# Altium PCB bdcmc25_revised.PcbDoc (part 1 of 4)
Units mm, origin at the board's own origin, x right, y up, seen from the top; angles counter-clockwise.
Board outline 177.8 x 69.85 mm, 4 copper layers (Top Layer, Layer 2 (GND), Layer 3 (GND), Bottom Layer), stack 0.603 mm thick; 363 components, 158 nets, 1074 pads, 732 vias.
Unrouted connection lines stored in the file: 6.
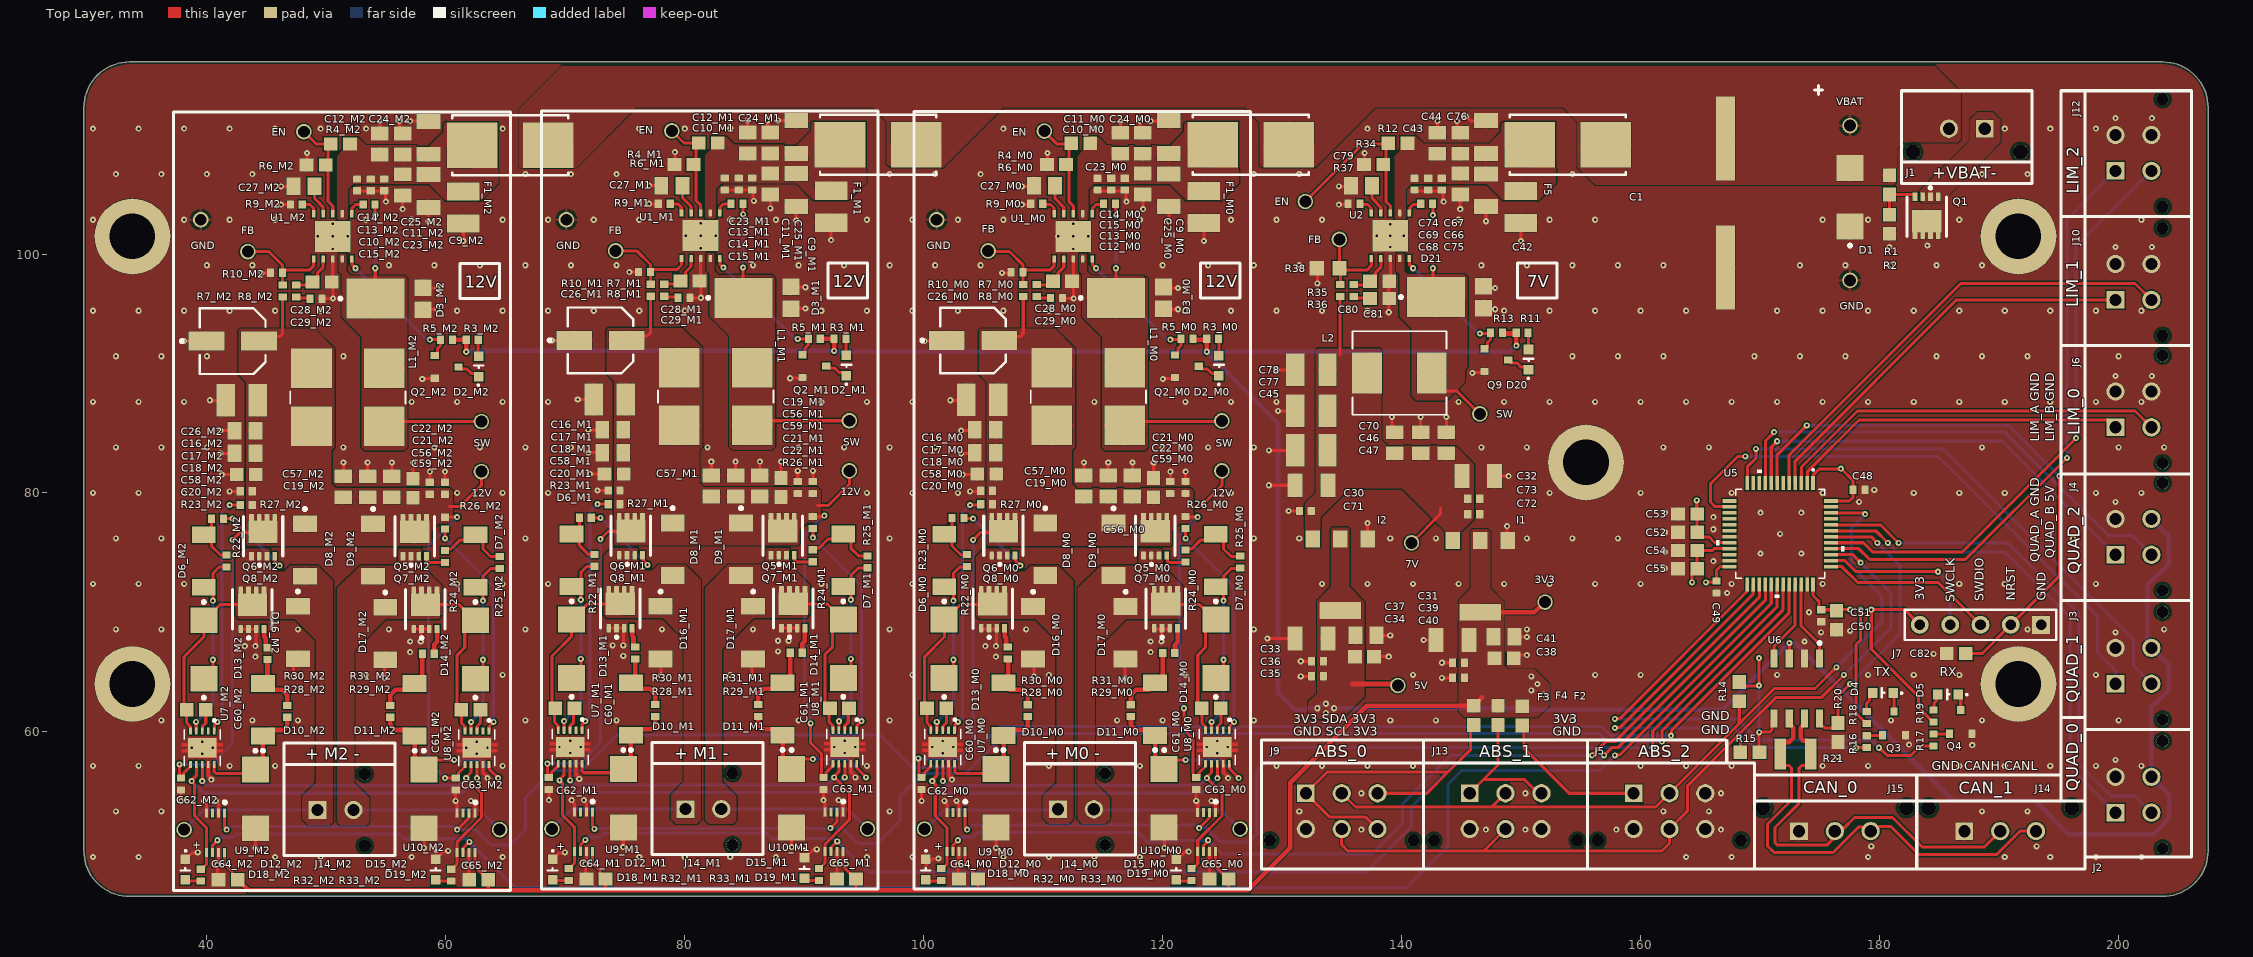
[diagram p0: Top Layer view]
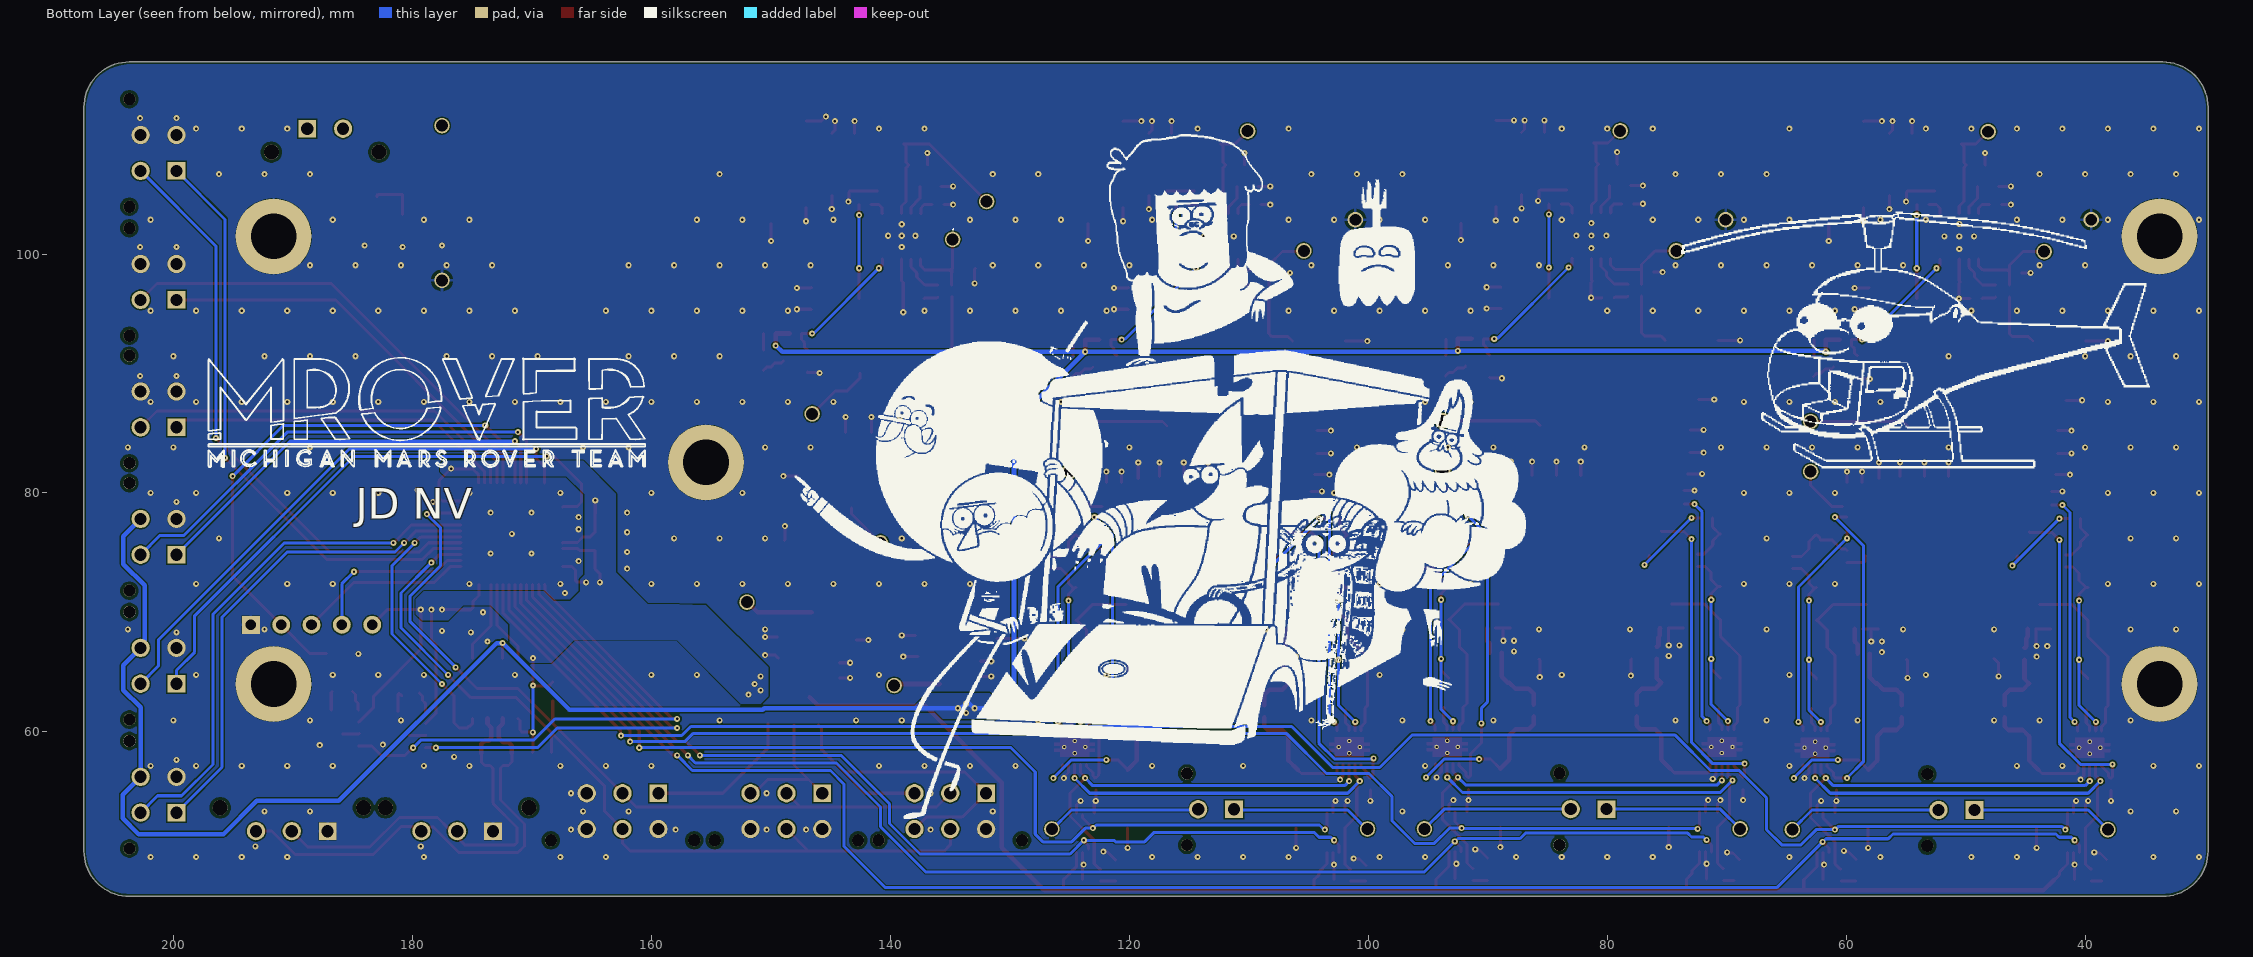
[diagram p1: Bottom Layer view, seen from below]
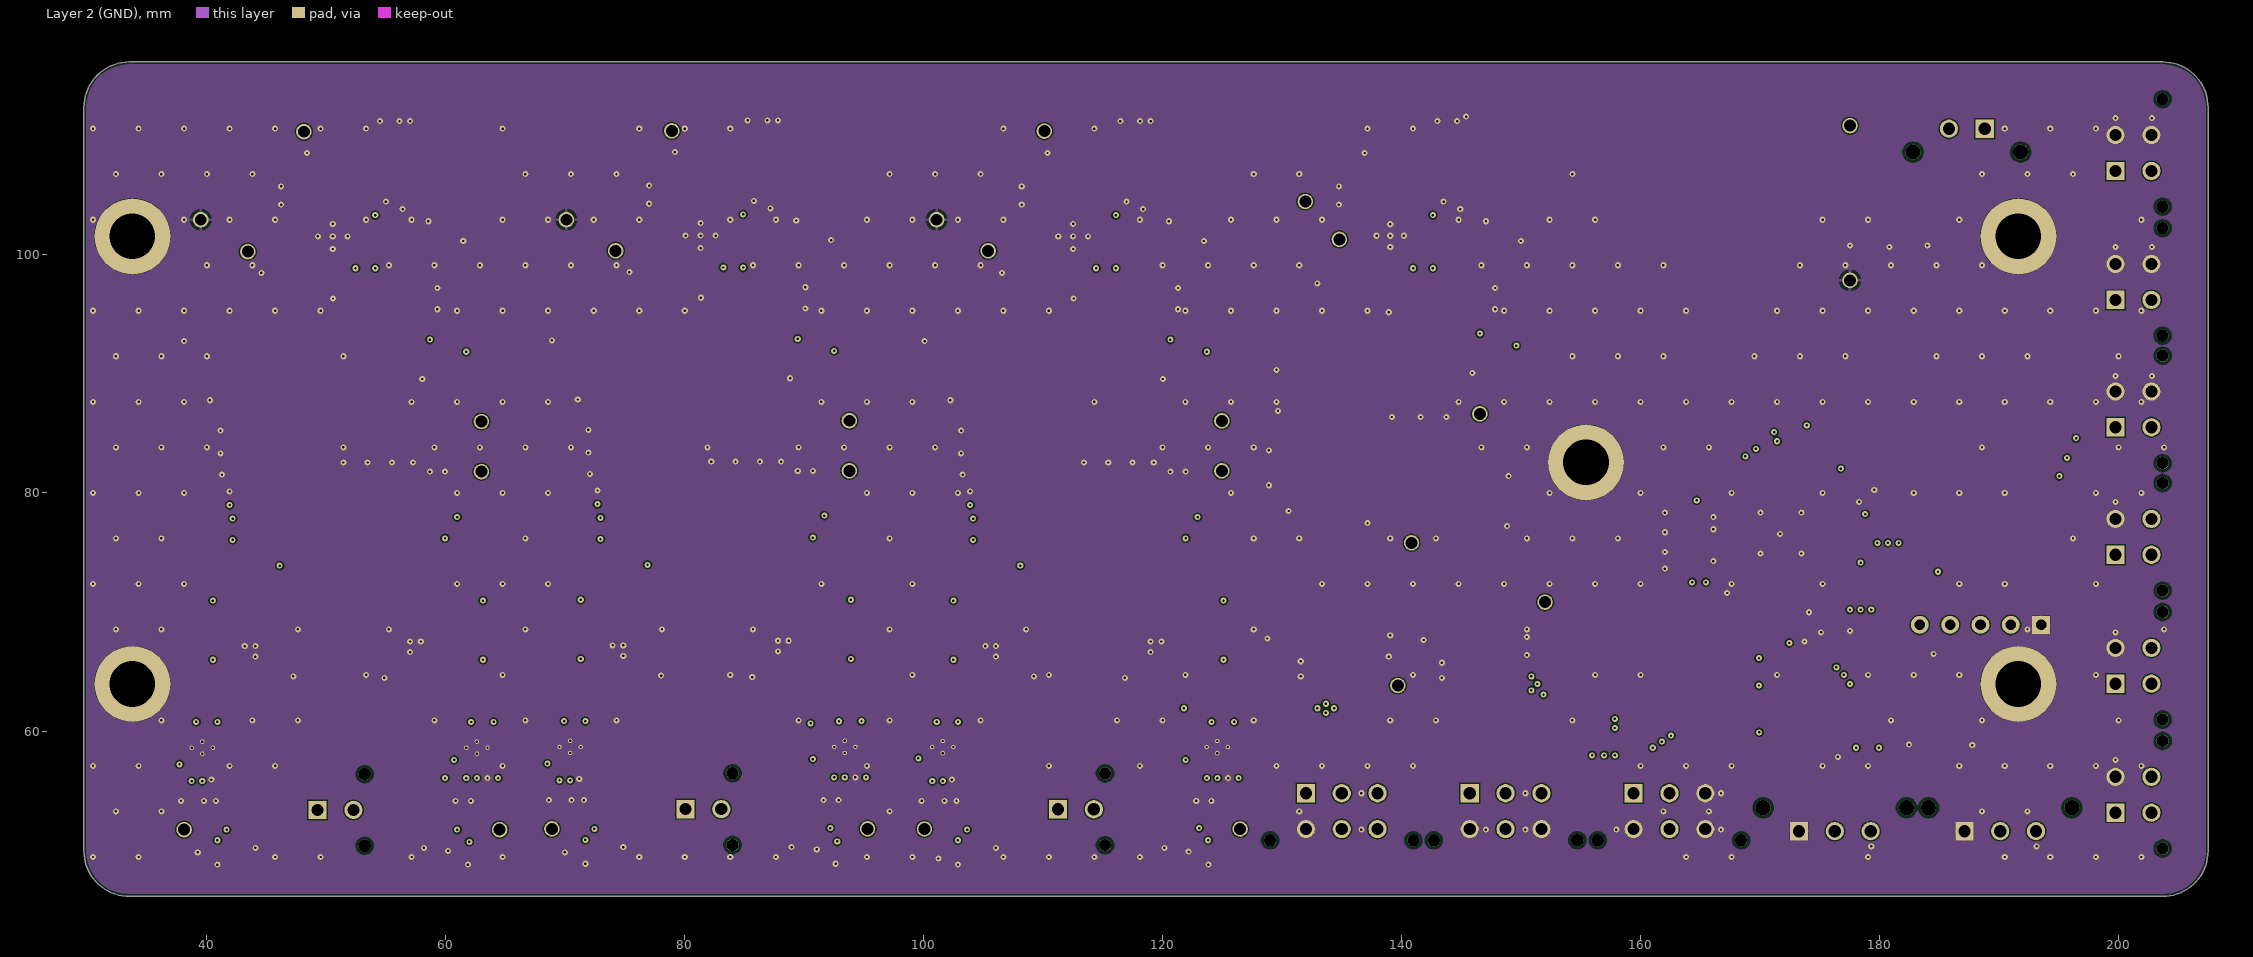
[diagram p2: Layer 2 (GND)]
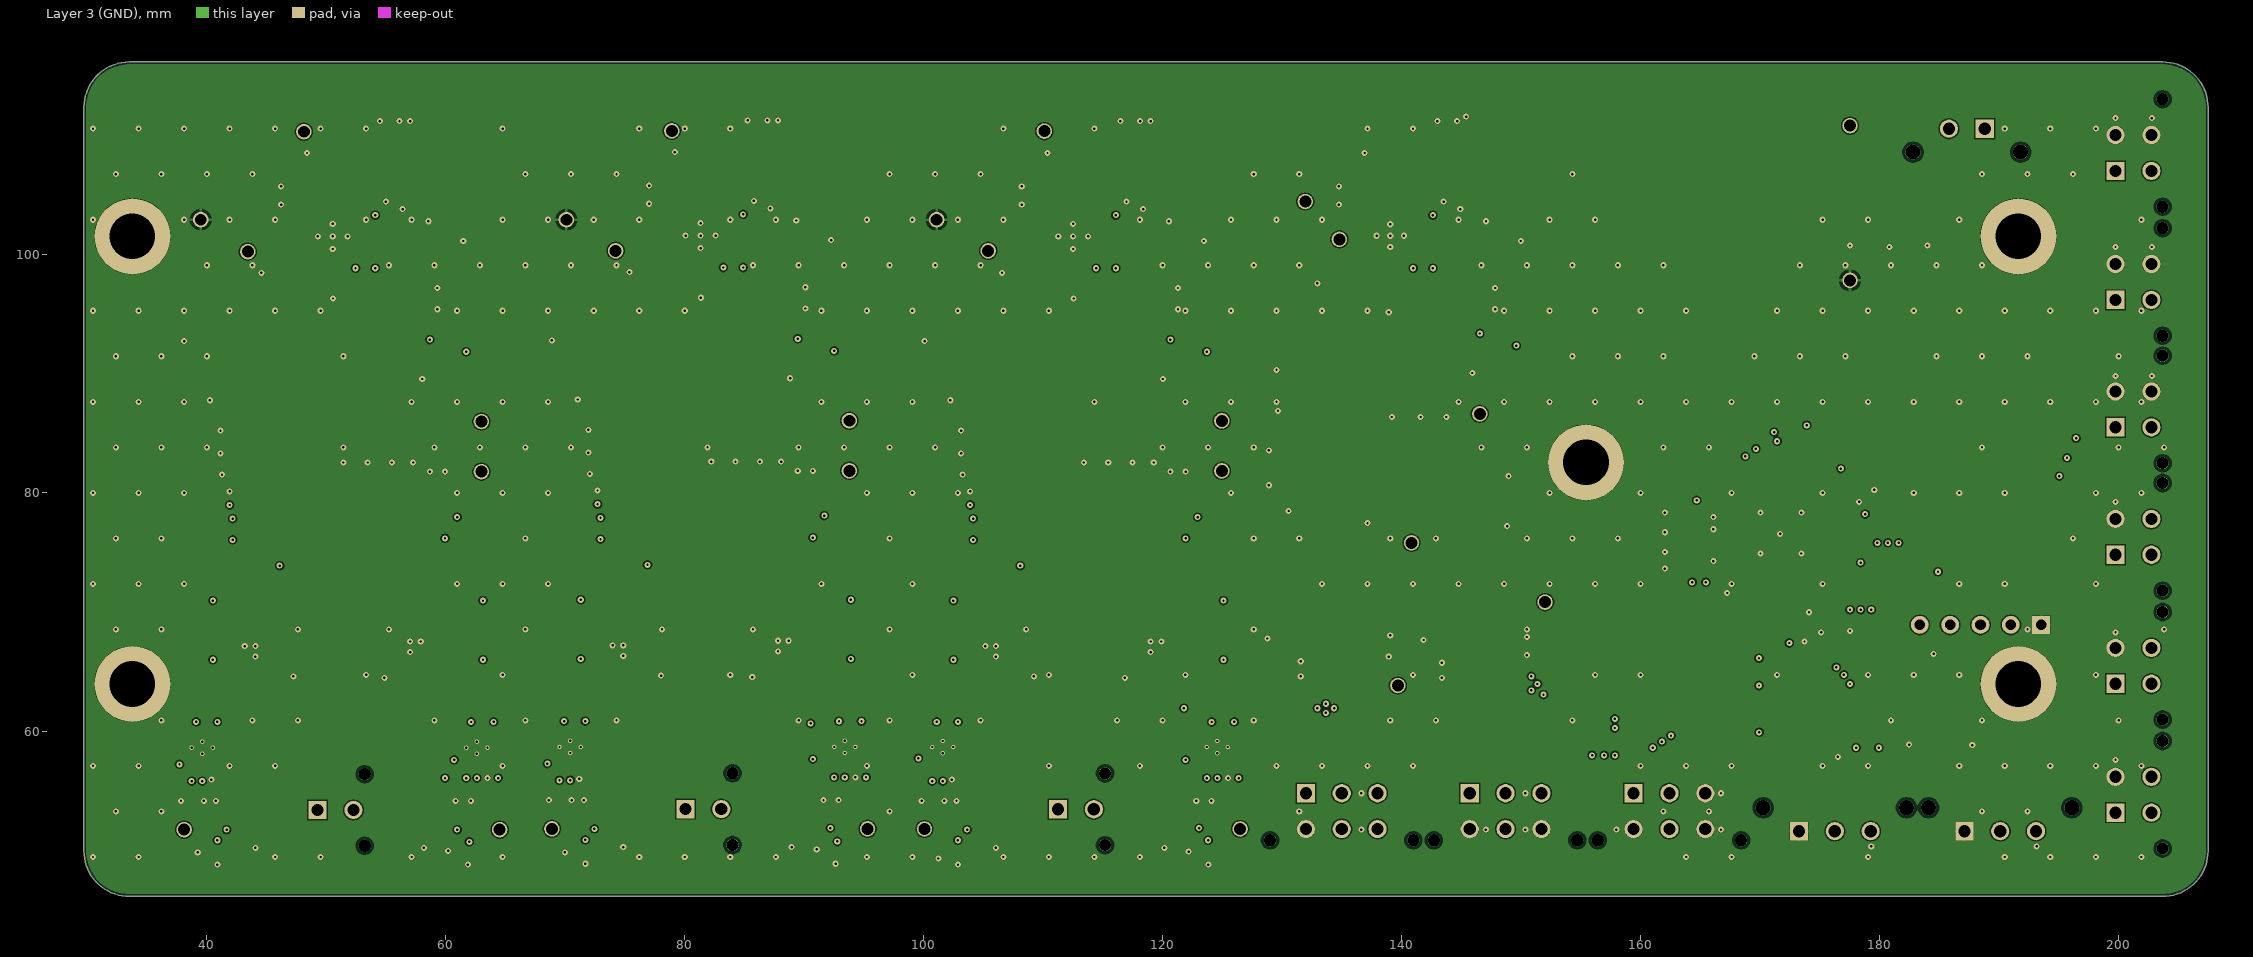
[diagram p3: Layer 3 (GND)]

## Layer stack, top to bottom
Top Solder: solder mask 0.0102, Solder Resist, Dk 3.5
Top Layer: signal copper 0.0356
Dielectric 2: prepreg 0.0711, PP-006, Dk 4.1
Layer 2 (GND): signal copper 0.035
Dielectric 1: dielectric 0.32, FR-4, Dk 4.8
Layer 3 (GND): signal copper 0.035
Dielectric 5: prepreg 0.0711, PP-006, Dk 4.1
Bottom Layer: signal copper 0.0356
Bottom Solder: solder mask 0.0102, Solder Resist, Dk 3.5

## Board outline
29.718,50.038 29.718,112.268 cw(c33.528,112.268) 33.528,116.078 203.708,116.078 cw(c203.708,112.268) 207.518,112.268 207.518,50.038 cw(c203.708,50.038) 203.708,46.228 33.528,46.228 cw(c33.528,50.038)

## Design rules (kind name [scope] priority, off if disabled: settings)
BoardOutlineClearance [All] p1: gap=0.2 ignorepadtopadclearanceinfootprint=FALSE
Clearance [All] p1: gap=0.102 ignorepadtopadclearanceinfootprint=FALSE except(0.127: Arc-Via Track-Via SMDPad-Via THPad-Via Via-Via Via-Fill Via-Poly Via-Region Via-Text; 0.25: Arc-Hole Track-Hole SMDPad-Hole THPad-Hole Via-Hole Fill-Hole Poly-Hole Region-Hole Text-Hole)
ComponentClearance [All] p1: gap=0.102 collisioncheckmode=3 verticalgap=0.102 showdistances=TRUE
DiffPairsRouting DiffPair_DiffPairsRouting [InDifferentialPair ('CAN')] p1: maxlimit=0.254 minlimit=0.254 mostfreqgap=0.254 toplayer_minwidth=0.381 toplayer_maxwidth=0.381 toplayer_prefwidth=0.381 midlayer1_minwidth=0.381 midlayer1_maxwidth=0.381 midlayer1_prefwidth=0.381 midlayer2_minwidth=0.381 midlayer2_maxwidth=0.381 midlayer2_prefwidth=0.381 bottomlayer_minwidth=0.381 bottomlayer_maxwidth=0.381 bottomlayer_prefwidth=0.381 maxuncoupledlength=12.7
DiffPairsRouting DiffPair_DiffPairsRouting_1 [InDifferentialPair ('CAN')] p2: maxlimit=0.127 minlimit=0.127 mostfreqgap=0.127 toplayer_minwidth=0.051 toplayer_maxwidth=0.051 toplayer_prefwidth=0.051 midlayer1_minwidth=0.015 midlayer1_maxwidth=0.015 midlayer1_prefwidth=0.015 midlayer2_minwidth=0.015 midlayer2_maxwidth=0.015 midlayer2_prefwidth=0.015 bottomlayer_minwidth=0.051 bottomlayer_maxwidth=0.051 bottomlayer_prefwidth=0.051 impedanceprofiledriven=TRUE impedanceprofileid={AFAFF1AD-85D3-44F0-8B6C-0EA1EA1200DB} impedanceprofilevalue=120.000000 maxuncoupledlength=12.7
DiffPairsRouting DiffPair_DiffPairsRouting_2 [InDifferentialPair ('CAN')] p3: maxlimit=0.254 minlimit=0.254 mostfreqgap=0.254 toplayer_minwidth=0.381 toplayer_maxwidth=0.381 toplayer_prefwidth=0.381 midlayer1_minwidth=0.381 midlayer1_maxwidth=0.381 midlayer1_prefwidth=0.381 midlayer2_minwidth=0.381 midlayer2_maxwidth=0.381 midlayer2_prefwidth=0.381 bottomlayer_minwidth=0.381 bottomlayer_maxwidth=0.381 bottomlayer_prefwidth=0.381 maxuncoupledlength=12.7
DiffPairsRouting [All] p4: maxlimit=0.102 minlimit=0.102 mostfreqgap=0.102 toplayer_minwidth=0.102 toplayer_maxwidth=1816.048 toplayer_prefwidth=0.102 midlayer1_minwidth=0.102 midlayer1_maxwidth=1816.048 midlayer1_prefwidth=0.102 midlayer2_minwidth=0.102 midlayer2_maxwidth=1816.048 midlayer2_prefwidth=0.102 bottomlayer_minwidth=0.102 bottomlayer_maxwidth=1816.048 bottomlayer_prefwidth=0.102 maxuncoupledlength=12.7
Height [All] p1: minheight=0 maxheight=1816.048 prefheight=12.7
HoleSize [All] p1: absolutevalues=TRUE maxlimit=6.3 minlimit=0.2 maxpercent=80.000 minpercent=20.000
HoleToHoleClearance [All] p1: gap=0.25 allowstackedmicrovias=FALSE
MatchedLengths DiffPair_MatchedLengths [InDifferentialPair ('CAN')] p1: tolerance=25.4 checknetsindiffpair=FALSE checkdiffpairvsdiffpair=TRUE checkxsignals=TRUE checkothers=TRUE
MatchedLengths DiffPair_MatchedLengths_1 [InDifferentialPair ('CAN')] p2: tolerance=25.4 checknetsindiffpair=FALSE checkdiffpairvsdiffpair=TRUE checkxsignals=TRUE checkothers=TRUE
MatchedLengths DiffPair_MatchedLengths_2 [InDifferentialPair ('CAN')] p3: tolerance=25.4 checknetsindiffpair=FALSE checkdiffpairvsdiffpair=TRUE checkxsignals=TRUE checkothers=TRUE
MinimumAnnularRing [All] p1: minimumring=0.076
MinimumSolderMaskSliver [All] p1: minsoldermaskwidth=0
PlaneClearance [All] p1: clearance=0.102
PlaneConnect PlaneConnectPowerPads [InPadClass('PowerPads')] p1: planeconnectstyle=Direct reliefexpansion=0.508 reliefentries=4 reliefconductorwidth=0.254 reliefairgap=0.254
PlaneConnect [All] p2: pad.planeconnectstyle=Relief pad.reliefexpansion=0.3 pad.reliefentries=4 pad.reliefconductorwidth=0.102 pad.reliefairgap=0.102 via.planeconnectstyle=Direct via.reliefexpansion=0.3 via.reliefentries=4 via.reliefconductorwidth=0.127 via.reliefairgap=0.127
PolygonConnect PolygonConnect_1 [InNetClass('All Nets') vs InNet('No Net')] p1: connectstyle=Direct reliefconductorwidth=0.254 reliefentries=4 polygonreliefangle="90 Angle" airgapwidth=0.254
RoutingVias [All] p1: holewidth=0.2 width=0.45 viastyle="Through Hole" minholewidth=0.2 minwidth=0.45 maxholewidth=6.3 maxwidth=6.55
SilkToSilkClearance [All] p1: silktosilkclearance=0
SilkToSolderMaskClearance [IsPad] p1: minsilkscreentomaskgap=0.102 clearancetoexposedcopper=TRUE
SolderMaskExpansion [All] p1: expansion=0.075 istentingtop=FALSE
Width [All] p1: maxlimit=1816.048 minlimit=0.102 preferedwidth=0.102
20 further rules are at their usual default settings.

## Classes and differential pairs
component class U_LDOs: 3V3 5V C30 C31 C32 C33 C34 C35 C36 C37 C38 C39 C40 C41 I1 I2
component class U_7V_BUCK_LDOs: 7V C42 C43 C44 C45 C46 C47 C66 C67 C68 C69 C70 C71 C72 C73 C74 C75 C76 C77 C78 C79 C80 C81 D20 D21 EN F5 FB L2 Q9 R11 R12 R13 R34 R35 R36 R37 R38 SW U2
channel class Motor_Control: M0 M1 M2
channel class 12V_Buck_Motor: M0 M1 M2
component class M2: + C56_M2 C57_M2 C58_M2 C59_M2 C60_M2 C61_M2 C62_M2 C63_M2 C64_M2 C65_M2 D6_M2 D7_M2 D8_M2 D9_M2 D10_M2 D11_M2 D12_M2 D13_M2 D14_M2 D15_M2 D16_M2 D17_M2 D18_M2 D19_M2 J14_M2 Q5_M2 Q6_M2 Q7_M2 Q8_M2 R22_M2 R23_M2 R24_M2 R25_M2 R26_M2 R27_M2 R28_M2 R29_M2 R30_M2 R31_M2 R32_M2 R33_M2 U7_M2 U8_M2 U9_M2 U10_M2
component class M1: + C56_M1 C57_M1 C58_M1 C59_M1 C60_M1 C61_M1 C62_M1 C63_M1 C64_M1 C65_M1 D6_M1 D7_M1 D8_M1 D9_M1 D10_M1 D11_M1 D12_M1 D13_M1 D14_M1 D15_M1 D16_M1 D17_M1 D18_M1 D19_M1 J14_M1 Q5_M1 Q6_M1 Q7_M1 Q8_M1 R22_M1 R23_M1 R24_M1 R25_M1 R26_M1 R27_M1 R28_M1 R29_M1 R30_M1 R31_M1 R32_M1 R33_M1 U7_M1 U8_M1 U9_M1 U10_M1
component class M0: + C56_M0 C57_M0 C58_M0 C59_M0 C60_M0 C61_M0 C62_M0 C63_M0 C64_M0 C65_M0 D6_M0 D7_M0 D8_M0 D9_M0 D10_M0 D11_M0 D12_M0 D13_M0 D14_M0 D15_M0 D16_M0 D17_M0 D18_M0 D19_M0 J14_M0 Q5_M0 Q6_M0 Q7_M0 Q8_M0 R22_M0 R23_M0 R24_M0 R25_M0 R26_M0 R27_M0 R28_M0 R29_M0 R30_M0 R31_M0 R32_M0 R33_M0 U7_M0 U8_M0 U9_M0 U10_M0
component class "Input Power": D1 GND J1 Q1 R1 R2 VBAT
component class Designator: C48 C49 C50 C51 C52 C53 C54 C55 C82 D4 D5 F2 F3 F4 F? J2 J3 J4 J5 J6 J7 J9 J10 J12 J13 J14 J15 Q3 Q4 R14 R15 R16 R17 R18 R19 R20 R21 U5 U6
differential pair CAN: +CAN_P -CAN_N

## Components (designator, comment, footprint, x,y, rotation, side; value= is the part's Value field where it differs from the comment)
3V3 "5003" TEST-POINT-0001#1 152.019,70.866 r0 top (schematic designator TP5)
5V "5003" TEST-POINT-0001#1 139.7,63.881 r0 top (schematic designator TP4)
7V "5003" TEST-POINT-0001#1 140.843,75.819 r0 top (schematic designator TP6)
12V "5003" TEST-POINT-0001#1 62.992,81.788 r90 top (schematic designator TP3)
12V "5003" TEST-POINT-0001#1 93.785,81.853 r90 top (schematic designator TP3)
12V "5003" TEST-POINT-0001#1 124.968,81.844 r90 top (schematic designator TP3)
+ "5003" TEST-POINT-0001#2 38.1,51.816 r90 top (schematic designator TP8)
+ "5003" TEST-POINT-0001#1 68.893,51.881 r90 top (schematic designator TP8)
+ "5003" TEST-POINT-0001#1 100.076,51.872 r90 top (schematic designator TP8)
- "5003" TEST-POINT-0001#1 95.309,51.881 r90 top (schematic designator TP9)
- "5003" TEST-POINT-0001#1 64.516,51.816 r90 top (schematic designator TP9)
- "5003" TEST-POINT-0001#1 126.492,51.872 r90 top (schematic designator TP9)
C1 "100SEV100M12.5X16" ELEC-100U-0001 167.132,104.267 r0 top
C9_M0 "CL32B106KBJNNNE" CAP-1210 123.444,103.942 r90 top (schematic designator C9)
C9_M1 "CL32B106KBJNNNE" CAP-1210 92.261,103.951 r90 top (schematic designator C9)
C9_M2 "CL32B106KBJNNNE" CAP-1210 61.468,103.886 r90 top (schematic designator C9)
C10_M0 "CC0805KKX7R9BB105" CAP-0805 118.364,109.276 r270 top (schematic designator C10)
C10_M1 "CC0805KKX7R9BB105" CAP-0805 87.181,109.285 r270 top (schematic designator C10)
C10_M2 "CC0805KKX7R9BB105" CAP-0805 56.388,109.22 r270 top (schematic designator C10)
C11_M0 "CC0805KRX7R9BB104" CAP-0805 116.459,109.276 r270 top (schematic designator C11)
C11_M1 "CC0805KRX7R9BB104" CAP-0805 87.181,105.856 r90 top (schematic designator C11)
C11_M2 "CC0805KRX7R9BB104" CAP-0805 56.388,105.791 r90 top (schematic designator C11)
C12_M0 "GRM2195C1H103JA01D" CAP-0805 118.364,105.847 r90 top (schematic designator C12)
C12_M1 "GRM2195C1H103JA01D" CAP-0805 85.276,109.285 r270 top (schematic designator C12)
C12_M2 "GRM2195C1H103JA01D" CAP-0805 54.483,109.22 r270 top (schematic designator C12)
C13_M0 "CC0402JRNPO9BN101" CAP-0402 114.554,105.847 r90 top (schematic designator C13)
C13_M1 "CC0402JRNPO9BN101" CAP-0402 83.371,105.856 r90 top (schematic designator C13)
C13_M2 "CC0402JRNPO9BN101" CAP-0402 53.721,105.791 r90 top (schematic designator C13)
C14_M0 "CC0402JRNPO9BN100" CAP-0402 115.697,105.847 r90 top (schematic designator C14)
C14_M1 "CC0402JRNPO9BN100" CAP-0402 84.514,105.856 r90 top (schematic designator C14)
C14_M2 "CC0402JRNPO9BN100" CAP-0402 52.578,105.791 r90 top (schematic designator C14)
C15_M0 "CC0402KRX7R9BB102" CAP-0402 116.84,105.847 r90 top (schematic designator C15)
C15_M1 "CC0402KRX7R9BB102" CAP-0402 85.657,105.856 r90 top (schematic designator C15)
C15_M2 "CC0402KRX7R9BB102" CAP-0402 54.864,105.791 r90 top (schematic designator C15)
C16_M0 "CL32B106KBJNNNE" CAP-1210 104.911,87.813 r0 top (schematic designator C16)
C16_M1 "CL32B106KBJNNNE" CAP-1210 73.728,87.822 r0 top (schematic designator C16)
C16_M2 "CL32B106KBJNNNE" CAP-1210 42.935,87.757 r0 top (schematic designator C16)
C17_M0 "CC0805KKX7R9BB105" CAP-0805 105.165,85.273 r0 top (schematic designator C17)
C17_M1 "CC0805KKX7R9BB105" CAP-0805 73.982,85.282 r0 top (schematic designator C17)
C17_M2 "CC0805KKX7R9BB105" CAP-0805 43.189,85.217 r0 top (schematic designator C17)
C18_M0 "CC0805KRX7R9BB104" CAP-0805 105.165,83.368 r0 top (schematic designator C18)
C18_M1 "CC0805KRX7R9BB104" CAP-0805 73.982,83.377 r0 top (schematic designator C18)
C18_M2 "CC0805KRX7R9BB104" CAP-0805 43.189,83.312 r0 top (schematic designator C18)
C19_M0 "GRM2195C1H103JA01D" CAP-0805 115.443,80.574 r270 top (schematic designator C19)
C19_M1 "GRM2195C1H103JA01D" CAP-0805 84.26,80.583 r270 top (schematic designator C19)
C19_M2 "GRM2195C1H103JA01D" CAP-0805 53.467,80.518 r270 top (schematic designator C19)
C20_M0 "CC0402KRX7R9BB102" CAP-0402 105.283,80.193 r0 top (schematic designator C20)
C20_M1 "CC0402KRX7R9BB102" CAP-0402 74.1,80.202 r0 top (schematic designator C20)
C20_M2 "CC0402KRX7R9BB102" CAP-0402 43.307,80.137 r0 top (schematic designator C20)
C21_M0 "CC0402JRNPO9BN101" CAP-0402 120.65,80.447 r270 top (schematic designator C21)
C21_M1 "CC0402JRNPO9BN101" CAP-0402 89.467,80.456 r270 top (schematic designator C21)
C21_M2 "CC0402JRNPO9BN101" CAP-0402 58.674,80.391 r270 top (schematic designator C21)
C22_M0 "CC0402JRNPO9BN100" CAP-0402 121.92,80.447 r270 top (schematic designator C22)
C22_M1 "CC0402JRNPO9BN100" CAP-0402 90.737,80.456 r270 top (schematic designator C22)
C22_M2 "CC0402JRNPO9BN100" CAP-0402 59.944,80.391 r270 top (schematic designator C22)
C23_M0 "CC0402KRX7R7BB104" CAP-0402 115.57,104.196 r0 top (schematic designator C23)
C23_M1 "CC0402KRX7R7BB104" CAP-0402 84.387,104.205 r0 top (schematic designator C23)
C23_M2 "CC0402KRX7R7BB104" CAP-0402 53.594,104.14 r0 top (schematic designator C23)
C24_M0 "CC1206KKX7R0BB225" CAP-1206 120.523,109.784 r270 top (schematic designator C24)
C24_M1 "CC1206KKX7R0BB225" CAP-1206 89.34,109.793 r270 top (schematic designator C24)
C24_M2 "CC1206KKX7R0BB225" CAP-1206 58.547,109.728 r270 top (schematic designator C24)
C25_M0 "CC1206KKX7R0BB225" CAP-1206 120.523,105.339 r90 top (schematic designator C25)
C25_M1 "CC1206KKX7R0BB225" CAP-1206 89.34,105.348 r90 top (schematic designator C25)
C25_M2 "CC1206KKX7R0BB225" CAP-1206 58.547,105.283 r90 top (schematic designator C25)
C26_M0 "16SVPG47M" CAP-47U-0001 104.14,92.766 r0 top (schematic designator C26)
C26_M1 "16SVPG47M" CAP-47U-0001 72.957,92.775 r0 top (schematic designator C26)
C26_M2 "16SVPG47M" CAP-47U-0001 42.164,92.71 r0 top (schematic designator C26)
C27_M0 "GRM2165C1H272JA01D" CAP-0805 110.109,105.72 r0 top (schematic designator C27)
C27_M1 "GRM2165C1H272JA01D" CAP-0805 78.926,105.729 r0 top (schematic designator C27)
C27_M2 "GRM2165C1H272JA01D" CAP-0805 48.133,105.664 r0 top (schematic designator C27)
C28_M0 "CC0603CRNPO0BN6R8" CAP-0603 111.633,97.719 r180 top (schematic designator C28)
C28_M1 "CC0603CRNPO0BN6R8" CAP-0603 80.45,97.728 r180 top (schematic designator C28)
C28_M2 "CC0603CRNPO0BN6R8" CAP-0603 49.657,97.663 r180 top (schematic designator C28)
C29_M0 "0402N511J500CT" CAP-0402 111.125,96.322 r180 top (schematic designator C29)
C29_M1 "0402N511J500CT" CAP-0402 79.942,96.331 r180 top (schematic designator C29)
C29_M2 "0402N511J500CT" CAP-0402 49.149,96.266 r180 top (schematic designator C29)
C30 "293D106X9016A2TE3" CAP-1206 132.461,80.645 r0 top
C31 "293D106X9016A2TE3" CAP-1206 144.272,67.691 r0 top
C32 "293D106X9016A2TE3" CAP-1206 146.431,81.407 r180 top
C33 "293D106X9016A2TE3" CAP-1206 132.461,67.818 r0 top
C34 "CC0603KRX5R6BB106" CAP-0603 136.906,66.294 r180 top
C35 "CC0402KRX7R7BB104" CAP-0402 132.969,64.643 r0 top
C36 "CC0402KRX7R7BB104" CAP-0402 132.969,65.913 r0 top
C37 "CC0805JRNPO9BN471" CAP-0805 137.033,68.072 r180 top
C38 "CC0603KRX5R6BB106" CAP-0603 148.59,66.167 r180 top
C39 "CC0402KRX7R7BB104" CAP-0402 144.78,65.786 r0 top
C40 "CC0402KRX7R7BB104" CAP-0402 144.78,64.516 r0 top
C41 "CC0805JRNPO9BN471" CAP-0805 148.59,67.945 r180 top
C42 "CL32B106KBJNNNE" CAP-1210 149.987,103.942 r90 top
C43 "CC0805KKX7R9BB105" CAP-0805 144.907,109.276 r270 top
C44 "CC0805KRX7R9BB104" CAP-0805 143.002,109.276 r270 top
C45 "CL32B106KBJNNNE" CAP-1210 132.461,83.566 r0 top
C46 "CC0805KKX7R9BB105" CAP-0805 141.605,84.201 r270 top
C47 "CC0805KRX7R9BB104" CAP-0805 143.764,84.201 r270 top
C48 "CC0402KRX7R7BB104" CAP-0402 178.308,80.264 r180 top
C49 "CC0402KRX7R7BB104" CAP-0402 166.37,72.136 r90 top
C50 "CC0402KRX7R7BB104" CAP-0402 175.133,69.723 r90 top
C51 "CC0603KRX5R8BB475" CAP-0603 176.403,69.342 r90 top
C52 "CC0603KPX7R9BB103" CAP-0603 163.957,76.708 r0 top
C53 "CC0603KRX7R7BB105" CAP-0603 163.957,78.232 r0 top
C54 "CC0603KPX7R9BB103" CAP-0603 163.957,75.184 r0 top
C55 "CC0603KRX7R7BB105" CAP-0603 163.957,73.66 r0 top
C56_M0 "CC0805KKX7R9BB105" CAP-0805 117.475,80.574 r270 top (schematic designator C56)
C56_M1 "CC0805KKX7R9BB105" CAP-0805 86.292,80.583 r270 top (schematic designator C56)
C56_M2 "CC0805KKX7R9BB105" CAP-0805 55.499,80.518 r270 top (schematic designator C56)
C57_M0 "CC0805KKX7R9BB105" CAP-0805 113.411,80.574 r90 top (schematic designator C57)
C57_M1 "CC0805KKX7R9BB105" CAP-0805 82.228,80.583 r90 top (schematic designator C57)
C57_M2 "CC0805KKX7R9BB105" CAP-0805 51.435,80.518 r90 top (schematic designator C57)
C58_M0 "CC0603KPX7R9BB103" CAP-0603 105.283,81.59 r0 top (schematic designator C58)
C58_M1 "CC0603KPX7R9BB103" CAP-0603 74.1,81.599 r0 top (schematic designator C58)
C58_M2 "CC0603KPX7R9BB103" CAP-0603 43.307,81.534 r0 top (schematic designator C58)
C59_M0 "CC0603KPX7R9BB103" CAP-0603 119.253,80.447 r90 top (schematic designator C59)
C59_M1 "CC0603KPX7R9BB103" CAP-0603 88.07,80.456 r90 top (schematic designator C59)
C59_M2 "CC0603KPX7R9BB103" CAP-0603 57.277,80.391 r90 top (schematic designator C59)
C60_M0 "CC0603KRX7R0BB104" CAP-0603 101.092,61.976 r180 top (schematic designator C60)
C60_M1 "CC0603KRX7R0BB104" CAP-0603 69.977,61.976 r180 top (schematic designator C60)
C60_M2 "CC0603KRX7R0BB104" CAP-0603 39.116,61.849 r180 top (schematic designator C60)
C61_M0 "CC0603KRX7R0BB104" CAP-0603 124.079,61.976 r180 top (schematic designator C61)
C61_M1 "CC0603KRX7R0BB104" CAP-0603 92.964,61.976 r180 top (schematic designator C61)
C61_M2 "CC0603KRX7R0BB104" CAP-0603 62.103,61.849 r180 top (schematic designator C61)
C62_M0 "CC0402KRX7R9BB102" CAP-0402 99.822,55.682 r90 top (schematic designator C62)
C62_M1 "CC0402KRX7R9BB102" CAP-0402 68.639,55.691 r90 top (schematic designator C62)
C62_M2 "CC0402KRX7R9BB102" CAP-0402 37.846,55.626 r90 top (schematic designator C62)
C63_M0 "CC0402KRX7R9BB102" CAP-0402 122.809,55.682 r90 top (schematic designator C63)
C63_M1 "CC0402KRX7R9BB102" CAP-0402 91.626,55.691 r90 top (schematic designator C63)
C63_M2 "CC0402KRX7R9BB102" CAP-0402 60.833,55.626 r90 top (schematic designator C63)
C64_M0 "CC0603KRX7R0BB104" CAP-0603 103.759,47.681 r180 top (schematic designator C64)
C64_M1 "CC0603KRX7R0BB104" CAP-0603 72.576,47.69 r180 top (schematic designator C64)
C64_M2 "CC0603KRX7R0BB104" CAP-0603 41.783,47.625 r180 top (schematic designator C64)
C65_M0 "CC0603KRX7R0BB104" CAP-0603 124.736,47.681 r180 top (schematic designator C65)
C65_M1 "CC0603KRX7R0BB104" CAP-0603 93.553,47.69 r180 top (schematic designator C65)
C65_M2 "CC0603KRX7R0BB104" CAP-0603 62.76,47.625 r180 top (schematic designator C65)
C66 "GRM2195C1H103JA01D" CAP-0805 144.907,105.847 r90 top
C67 "CC0402KRX7R9BB102" CAP-0402 143.383,105.847 r90 top
C68 "CC0402JRNPO9BN101" CAP-0402 142.24,105.847 r90 top
C69 "CC0402JRNPO9BN100" CAP-0402 141.097,105.847 r90 top
C70 "GRM2195C1H103JA01D" CAP-0805 139.446,84.201 r270 top
C71 "CC0402KRX7R9BB102" CAP-0402 131.953,78.486 r0 top
C72 "CC0402JRNPO9BN101" CAP-0402 146.05,78.232 r180 top
C73 "CC0402JRNPO9BN100" CAP-0402 146.05,79.502 r180 top
C74 "CC0402KRX7R7BB104" CAP-0402 142.113,104.196 r0 top
C75 "CC1206KKX7R0BB225" CAP-1206 147.066,105.339 r90 top
C76 "CC1206KKX7R0BB225" CAP-1206 147.066,109.784 r270 top
C77 "C3225X7R1N106K250AC" CAP-1210 132.461,86.868 r0 top
C78 "C3225X7R1N106K250AC" CAP-1210 132.461,90.297 r0 top
C79 "GRM2165C1H272JA01D" CAP-0805 136.652,105.72 r0 top
C80 "CC0603CRNPO0BN6R8" CAP-0603 138.176,97.719 r180 top
C81 "GRM1885C1H302JA01D" CAP-0603 138.176,96.266 r0 top
C82 "CC0603KRX7R0BB104" CAP-0603 186.436,66.548 r0 top
D1 "SMBJ40CA" "DO-214AA (SMBJ)" 177.546,104.775 r270 top
D2_M0 "BL-HKC36G-AV-TRB" LED-0603 125.476,89.21 r90 top (schematic designator D2)
D2_M1 "BL-HKC36G-AV-TRB" LED-0603 94.293,89.219 r90 top (schematic designator D2)
D2_M2 "BL-HKC36G-AV-TRB" LED-0603 63.5,89.154 r90 top (schematic designator D2)
D3_M0 "PDS760-13" DO-POWERDI5 117.221,96.322 r180 top (schematic designator D3)
D3_M1 "PDS760-13" DO-POWERDI5 86.038,96.331 r180 top (schematic designator D3)
D3_M2 "PDS760-13" DO-POWERDI5 55.245,96.266 r180 top (schematic designator D3)
D4 "BL-HKC36G-AV-TRB" LED-0603 181.737,64.008 r180 top
D5 "BL-HKC36G-AV-TRB" LED-0603 187.198,63.881 r180 top
D6_M0 "PMEG6030EP,115" DIO-SOD128 101.727,74.351 r0 top (schematic designator D6)
D6_M1 "PMEG6030EP,115" DIO-SOD128 70.544,74.36 r0 top (schematic designator D6)
D6_M2 "PMEG6030EP,115" DIO-SOD128 39.751,74.295 r0 top (schematic designator D6)
D7_M0 "PMEG6030EP,115" DIO-SOD128 124.46,74.351 r0 top (schematic designator D7)
D7_M1 "PMEG6030EP,115" DIO-SOD128 93.277,74.36 r0 top (schematic designator D7)
D7_M2 "PMEG6030EP,115" DIO-SOD128 62.484,74.295 r0 top (schematic designator D7)
D8_M0 "PMEG6030EP,115" DIO-SOD128 110.184,75.284 r180 top (schematic designator D8)
D8_M1 "PMEG6030EP,115" DIO-SOD128 79.001,75.293 r180 top (schematic designator D8)
D8_M2 "PMEG6030EP,115" DIO-SOD128 48.208,75.228 r180 top (schematic designator D8)
D9_M0 "PMEG6030EP,115" DIO-SOD128 115.899,75.284 r180 top (schematic designator D9)
D9_M1 "PMEG6030EP,115" DIO-SOD128 84.716,75.293 r180 top (schematic designator D9)
D9_M2 "PMEG6030EP,115" DIO-SOD128 53.923,75.228 r180 top (schematic designator D9)
D10_M0 "PMEG6030EP,115" DIO-SOD128 106.68,61.905 r0 top (schematic designator D10)
D10_M1 "PMEG6030EP,115" DIO-SOD128 75.497,61.914 r0 top (schematic designator D10)
D10_M2 "PMEG6030EP,115" DIO-SOD128 44.704,61.849 r0 top (schematic designator D10)
D11_M0 "PMEG6030EP,115" DIO-SOD128 119.38,61.905 r0 top (schematic designator D11)
D11_M1 "PMEG6030EP,115" DIO-SOD128 88.197,61.914 r0 top (schematic designator D11)
D11_M2 "PMEG6030EP,115" DIO-SOD128 57.404,61.849 r0 top (schematic designator D11)
D12_M0 "SMBJ12CA" "DO-214AA (SMBJ)" 106.045,54.412 r90 top (schematic designator D12)
D12_M1 "SMBJ12CA" "DO-214AA (SMBJ)" 74.862,54.421 r90 top (schematic designator D12)
D12_M2 "SMBJ12CA" "DO-214AA (SMBJ)" 44.069,54.356 r90 top (schematic designator D12)
D13_M0 "SMBJ12CA" "DO-214AA (SMBJ)" 101.727,66.985 r270 top (schematic designator D13)
D13_M1 "SMBJ12CA" "DO-214AA (SMBJ)" 70.544,66.994 r270 top (schematic designator D13)
D13_M2 "SMBJ12CA" "DO-214AA (SMBJ)" 39.751,66.929 r270 top (schematic designator D13)
D14_M0 "SMBJ12CA" "DO-214AA (SMBJ)" 124.46,66.985 r270 top (schematic designator D14)
D14_M1 "SMBJ12CA" "DO-214AA (SMBJ)" 93.277,66.994 r270 top (schematic designator D14)
D14_M2 "SMBJ12CA" "DO-214AA (SMBJ)" 62.484,66.929 r270 top (schematic designator D14)
D15_M0 "SMBJ12CA" "DO-214AA (SMBJ)" 120.142,54.412 r90 top (schematic designator D15)
D15_M1 "SMBJ12CA" "DO-214AA (SMBJ)" 88.959,54.421 r90 top (schematic designator D15)
D15_M2 "SMBJ12CA" "DO-214AA (SMBJ)" 58.166,54.356 r90 top (schematic designator D15)
D16_M0 "PMEG6030EP,115" DIO-SOD128 109.168,68.299 r180 top (schematic designator D16)
D16_M1 "PMEG6030EP,115" DIO-SOD128 77.985,68.308 r180 top (schematic designator D16)
D16_M2 "PMEG6030EP,115" DIO-SOD128 47.625,68.326 r180 top (schematic designator D16)
D17_M0 "PMEG6030EP,115" DIO-SOD128 116.915,68.299 r180 top (schematic designator D17)
D17_M1 "PMEG6030EP,115" DIO-SOD128 85.732,68.308 r180 top (schematic designator D17)
D17_M2 "PMEG6030EP,115" DIO-SOD128 54.939,68.243 r180 top (schematic designator D17)
D18_M0 "BL-HKC36G-AV-TRB" LED-0603 99.441,49.911 r270 top (schematic designator D18)
D18_M1 "BL-HKC36G-AV-TRB" LED-0603 68.199,49.911 r270 top (schematic designator D18)
D18_M2 "BL-HKC36G-AV-TRB" LED-0603 37.465,49.911 r270 top (schematic designator D18)
D19_M0 "BL-HKC36G-AV-TRB" LED-0603 120.396,49.911 r270 top (schematic designator D19)
D19_M1 "BL-HKC36G-AV-TRB" LED-0603 89.281,50.038 r270 top (schematic designator D19)
D19_M2 "BL-HKC36G-AV-TRB" LED-0603 58.42,49.911 r270 top (schematic designator D19)
D20 "BL-HKC36G-AV-TRB" LED-0603 151.384,89.718 r90 top
D21 "PDS760-13" DO-POWERDI5 144.018,96.393 r180 top
EN "5003" TEST-POINT-0001#1 48.133,110.236 r90 top (schematic designator TP13)
EN "5003" TEST-POINT-0001#1 78.926,110.301 r90 top (schematic designator TP13)
EN "5003" TEST-POINT-0001#1 110.109,110.292 r90 top (schematic designator TP13)
EN "5003" TEST-POINT-0001#1 131.953,104.394 r90 top (schematic designator TP10)
F1_M0 "01550900M" FUSE-0001 127.381,109.149 r180 top (schematic designator F1)
F1_M1 "01550900M" FUSE-0001 96.198,109.158 r180 top (schematic designator F1)
F1_M2 "01550900M" FUSE-0001 65.405,109.093 r180 top (schematic designator F1)
F2 "0467.250NRHF" RES-0603 150.114,61.341 r270 top
F3 "0467.250NRHF" RES-0603 146.05,61.379 r270 top
F4 "0467.250NRHF" RES-0603 148.082,61.379 r270 top
F5 "01550900M" FUSE-0001 153.924,109.149 r180 top
FB "5003" TEST-POINT-0001#1 43.434,100.203 r90 top (schematic designator TP15)
FB "5003" TEST-POINT-0001#1 74.227,100.268 r90 top (schematic designator TP15)
FB "5003" TEST-POINT-0001#1 105.41,100.259 r90 top (schematic designator TP15)
FB "5003" TEST-POINT-0001#1 134.808,101.219 r90 top (schematic designator TP12)
GND "5003" TEST-POINT-0001#1 39.497,102.87 r0 top (schematic designator TP2)
GND "5003" TEST-POINT-0001#1 70.104,102.87 r0 top (schematic designator TP2)
GND "5003" TEST-POINT-0001#1 101.092,102.87 r0 top (schematic designator TP2)
GND "5003" TEST-POINT-0001#1 177.546,97.79 r0 top (schematic designator TP2)
I1 "LM1117IMPX-3.3/NOPB" IC-SOT-223-4 146.596,73.025 r270 top
I2 "LM1117MPX-5.0/NOPB" IC-SOT-223-4 134.874,73.152 r270 top
J1 "0436500215" CONN-2POS-0002 187.325,110.49 r0 top
J2 "Molex 43045-0412" CONN-4POS-0002 199.771,54.737 r270 top
J3 "Molex 43045-0412" CONN-4POS-0002 199.771,65.532 r270 top
J4 "Molex 43045-0412" CONN-4POS-0002 199.771,76.327 r270 top
J5 "Molex 43045-0612" CONN-6POS-0001 162.433,54.864 r180 top
J6 "Molex 43045-0412" CONN-4POS-0002 199.771,86.995 r270 top
J7 "Header 5" HDR1X5 193.548,68.961 r180 top
J9 "Molex 43045-0612" CONN-6POS-0001 135.001,54.864 r180 top
J10 "Molex 43045-0412" CONN-4POS-0002 199.771,97.663 r270 top
J12 "Molex 43045-0412" CONN-4POS-0002 199.771,108.458 r270 top
J13 "Molex 43045-0612" CONN-6POS-0001 148.717,54.864 r180 top
J14 "Molex 43650-0315" 43650-0315 190.119,51.689 r180 top
J14_M0 "0430450212" CONN-2POS-0001 111.252,53.523 r270 top (schematic designator J14)
J14_M1 "0430450212" CONN-2POS-0001 80.069,53.532 r270 top (schematic designator J14)
J14_M2 "0430450212" CONN-2POS-0001 49.276,53.467 r270 top (schematic designator J14)
J15 "Molex 43650-0315" 43650-0315 176.276,51.689 r180 top
L1_M0 "CSAD1010-150M" IND-15U-0002 109.22,93.655 r270 top (schematic designator L1)
L1_M1 "CSAD1010-150M" IND-15U-0002 78.037,93.664 r270 top (schematic designator L1)
L1_M2 "CSAD1010-150M" IND-15U-0002 47.244,93.599 r270 top (schematic designator L1)
L2 "IHLP2525CZER8R2M01" IND25X25CZ 139.827,90.043 r180 top
Q1 "CSD18543Q3AT" IC-8VSONCLIP 185.801,105.664 r180 top
Q2_M0 "T2N7002AK,LM" IC-SOT23-3 122.047,90.607 r270 top (schematic designator Q2)
Q2_M1 "T2N7002AK,LM" IC-SOT23-3 90.864,90.616 r270 top (schematic designator Q2)
Q2_M2 "T2N7002AK,LM" IC-SOT23-3 60.071,90.551 r270 top (schematic designator Q2)
Q3 "T2N7002AK,LM" IC-SOT23-3 181.229,60.706 r0 top
Q4 "T2N7002AK,LM" IC-SOT23-3 186.817,60.833 r0 top
Q5_M0 "CSD17575Q3" IC-8VSONCLIP 117.55,73.887 r0 top (schematic designator Q5)
Q5_M1 "CSD17575Q3" IC-8VSONCLIP 86.367,73.896 r0 top (schematic designator Q5)
Q5_M2 "CSD17575Q3" IC-8VSONCLIP 55.574,73.831 r0 top (schematic designator Q5)
Q6_M0 "CSD17575Q3" IC-8VSONCLIP 104.85,73.887 r0 top (schematic designator Q6)
Q6_M1 "CSD17575Q3" IC-8VSONCLIP 73.667,73.896 r0 top (schematic designator Q6)
Q6_M2 "CSD17575Q3" IC-8VSONCLIP 42.874,73.831 r0 top (schematic designator Q6)
Q7_M0 "CSD17575Q3" IC-8VSONCLIP 118.439,67.791 r0 top (schematic designator Q7)
Q7_M1 "CSD17575Q3" IC-8VSONCLIP 87.256,67.8 r0 top (schematic designator Q7)
Q7_M2 "CSD17575Q3" IC-8VSONCLIP 56.463,67.735 r0 top (schematic designator Q7)
Q8_M0 "CSD17575Q3" IC-8VSONCLIP 103.961,67.791 r0 top (schematic designator Q8)
Q8_M1 "CSD17575Q3" IC-8VSONCLIP 72.778,67.8 r0 top (schematic designator Q8)
Q8_M2 "CSD17575Q3" IC-8VSONCLIP 41.985,67.735 r0 top (schematic designator Q8)
Q9 "T2N7002AK,LM" IC-SOT23-3 147.955,91.115 r270 top
R1 "RC0603FR-07200KL" RES-0603 180.848,105.791 r270 top
R2 "RC0603FR-07100KL" RES-0603 180.848,102.489 r270 top
R3_M0 "RC0402FR-07240RL" RES-0402 124.198,92.893 r180 top (schematic designator R3)
R3_M1 "RC0402FR-07240RL" RES-0402 93.015,92.902 r180 top (schematic designator R3)
R3_M2 "RC0402FR-07240RL" RES-0402 62.222,92.837 r180 top (schematic designator R3)
R4_M0 "RC0603FR-072M15L" RES-0603 113.157,109.276 r0 top (schematic designator R4)
R4_M1 "RC0603FR-072M15L" RES-0603 81.974,109.285 r0 top (schematic designator R4)
R4_M2 "RC0603FR-072M15L" RES-0603 51.181,109.22 r0 top (schematic designator R4)
R5_M0 "RC0402FR-071KL" RES-0402 122.039,92.893 r0 top (schematic designator R5)
R5_M1 "RC0402FR-071KL" RES-0402 90.856,92.902 r0 top (schematic designator R5)
R5_M2 "RC0402FR-071KL" RES-0402 60.063,92.837 r0 top (schematic designator R5)
R6_M0 "RC0603FR-07100KL" RES-0603 111.125,107.498 r0 top (schematic designator R6)
R6_M1 "RC0603FR-07100KL" RES-0603 79.942,107.507 r0 top (schematic designator R6)
R6_M2 "RC0603FR-07100KL" RES-0603 49.149,107.442 r0 top (schematic designator R6)
R7_M0 "RC0402FR-07147KL" RES-0402 108.331,96.957 r270 top (schematic designator R7)
R7_M1 "RC0402FR-07147KL" RES-0402 77.148,96.966 r270 top (schematic designator R7)
R7_M2 "RC0402FR-07147KL" RES-0402 46.355,96.901 r270 top (schematic designator R7)
R8_M0 "RC0402FR-0759KL" RES-0402 109.474,96.957 r90 top (schematic designator R8)
R8_M1 "RC0402FR-0759KL" RES-0402 78.291,96.966 r90 top (schematic designator R8)
R8_M2 "RC0402FR-0759KL" RES-0402 47.498,96.901 r90 top (schematic designator R8)
R9_M0 "RTT021783FTH" RES-0402 109.474,104.196 r0 top (schematic designator R9)
R9_M1 "RTT021783FTH" RES-0402 78.291,104.205 r0 top (schematic designator R9)
R9_M2 "RTT021783FTH" RES-0402 47.498,104.14 r0 top (schematic designator R9)
R10_M0 "RC0402FR-0710K5L" RES-0402 107.823,98.481 r0 top (schematic designator R10)
R10_M1 "RC0402FR-0710K5L" RES-0402 76.64,98.49 r0 top (schematic designator R10)
R10_M2 "RC0402FR-0710K5L" RES-0402 45.847,98.425 r0 top (schematic designator R10)
R11 "RC0402FR-07240RL" RES-0402 150.106,93.401 r180 top
R12 "RC0603FR-072M15L" RES-0603 139.7,109.276 r0 top
R13 "RC0402FR-071KL" RES-0402 147.947,93.401 r0 top
R14 "RC0603FR-074K7L" RES-0603 168.275,63.373 r270 top
R15 "RC0603FR-074K7L" RES-0603 169.164,58.293 r180 top
R16 "RC0402FR-07470RL" RES-0402 178.943,59.182 r270 top
R17 "RC0402FR-07470RL" RES-0402 184.531,59.309 r270 top
R18 "RC0402FR-07100RL" RES-0402 178.943,61.214 r270 top
R19 "RC0402FR-07100RL" RES-0402 184.531,61.341 r270 top
R20 "RC0603FR-074K7L" RES-0603 176.53,59.944 r270 top
R21 "RC1210FR-07120RL" RES-1210 172.974,58.166 r180 top
R22_M0 "RC0402FR-7W33RL" RES-0402 103.632,74.351 r90 top (schematic designator R22)
R22_M1 "RC0402FR-7W33RL" RES-0402 72.449,74.36 r90 top (schematic designator R22)
R22_M2 "RC0402FR-7W33RL" RES-0402 41.656,74.295 r90 top (schematic designator R22)
R23_M0 "RC0402FR-7W33RL" RES-0402 102.87,77.907 r0 top (schematic designator R23)
R23_M1 "RC0402FR-7W33RL" RES-0402 71.687,77.916 r0 top (schematic designator R23)
R23_M2 "RC0402FR-7W33RL" RES-0402 40.894,77.851 r0 top (schematic designator R23)
R24_M0 "RC0402FR-7W33RL" RES-0402 121.92,74.732 r90 top (schematic designator R24)
R24_M1 "RC0402FR-7W33RL" RES-0402 90.737,74.741 r90 top (schematic designator R24)
R24_M2 "RC0402FR-7W33RL" RES-0402 59.944,74.676 r90 top (schematic designator R24)
R25_M0 "RC0402FR-7W33RL" RES-0402 126.492,74.224 r90 top (schematic designator R25)
R25_M1 "RC0402FR-7W33RL" RES-0402 95.309,74.233 r90 top (schematic designator R25)
R25_M2 "RC0402FR-7W33RL" RES-0402 64.516,74.168 r90 top (schematic designator R25)
R26_M0 "ERJ2GEJ1R0X" RES-0402 121.92,77.526 r90 top (schematic designator R26)
R26_M1 "ERJ2GEJ1R0X" RES-0402 90.737,77.535 r90 top (schematic designator R26)
R26_M2 "ERJ2GEJ1R0X" RES-0402 59.944,77.47 r90 top (schematic designator R26)
R27_M0 "ERJ2GEJ1R0X" RES-0402 105.283,79.05 r0 top (schematic designator R27)
R27_M1 "ERJ2GEJ1R0X" RES-0402 74.1,79.059 r0 top (schematic designator R27)
R27_M2 "ERJ2GEJ1R0X" RES-0402 43.307,78.994 r0 top (schematic designator R27)
R28_M0 "RC0402FR-7W33RL" RES-0402 108.712,61.778 r90 top (schematic designator R28)
R28_M1 "RC0402FR-7W33RL" RES-0402 77.529,61.787 r90 top (schematic designator R28)
R28_M2 "RC0402FR-7W33RL" RES-0402 46.736,61.722 r90 top (schematic designator R28)
R29_M0 "RC0402FR-7W33RL" RES-0402 117.348,61.778 r90 top (schematic designator R29)
R29_M1 "RC0402FR-7W33RL" RES-0402 86.165,61.787 r90 top (schematic designator R29)
R29_M2 "RC0402FR-7W33RL" RES-0402 55.372,61.722 r90 top (schematic designator R29)
R30_M0 "RC0402FR-7W33RL" RES-0402 107.061,66.604 r90 top (schematic designator R30)
R30_M1 "RC0402FR-7W33RL" RES-0402 75.878,66.613 r90 top (schematic designator R30)
R30_M2 "RC0402FR-7W33RL" RES-0402 45.085,66.548 r90 top (schematic designator R30)
R31_M0 "RC0402FR-7W33RL" RES-0402 120.523,66.604 r180 top (schematic designator R31)
R31_M1 "RC0402FR-7W33RL" RES-0402 89.34,66.613 r180 top (schematic designator R31)
R31_M2 "RC0402FR-7W33RL" RES-0402 58.547,66.548 r180 top (schematic designator R31)
R32_M0 "RC0402FR-07100RL" RES-0402 101.473,48.062 r270 top (schematic designator R32)
R32_M1 "RC0402FR-07100RL" RES-0402 70.29,48.071 r270 top (schematic designator R32)
R32_M2 "RC0402FR-07100RL" RES-0402 39.497,48.006 r270 top (schematic designator R32)
R33_M0 "RC0402FR-07100RL" RES-0402 122.428,48.062 r270 top (schematic designator R33)
R33_M1 "RC0402FR-07100RL" RES-0402 91.245,48.071 r270 top (schematic designator R33)
R33_M2 "RC0402FR-07100RL" RES-0402 60.452,48.006 r270 top (schematic designator R33)
R34 "RC0603FR-07100KL" RES-0603 137.668,107.498 r0 top
R35 "RC0402FR-0780K6L" RES-0402 134.874,96.957 r90 top
R36 "RC0402FR-0736K5L" RES-0402 136.017,96.957 r90 top
R37 "RTT021783FTH" RES-0402 136.017,104.196 r0 top
R38 "RT0805BRD0710K4L" RES-0805 133.858,98.806 r180 top
SW "5003" TEST-POINT-0001#1 62.992,85.979 r90 top (schematic designator TP14)
SW "5003" TEST-POINT-0001#1 93.785,86.044 r90 top (schematic designator TP14)
SW "5003" TEST-POINT-0001#1 124.968,86.035 r90 top (schematic designator TP14)
SW "5003" TEST-POINT-0001#1 146.558,86.614 r90 top (schematic designator TP11)
U1_M0 "TPS54561DPRR" IC-10WSON 112.522,101.473 r270 top (schematic designator U1)
U1_M1 "TPS54561DPRR" IC-10WSON 81.339,101.538 r270 top (schematic designator U1)
U1_M2 "TPS54561DPRR" IC-10WSON 50.546,101.473 r270 top (schematic designator U1)
U2 "TPS54561DPRR" IC-10WSON 139.065,101.529 r270 top
U5 "STM32G431CBT6" IC-LQFP48 171.704,76.581 r270 top
U6 "TCAN1044VDRQ1" IC-8SOIC 173.101,63.627 r180 top
U7_M0 "UCC27282DRCR" IC-10VSON 101.6,58.73 r270 top (schematic designator U7)
U7_M1 "UCC27282DRCR" IC-10VSON 70.417,58.739 r270 top (schematic designator U7)
U7_M2 "UCC27282DRCR" IC-10VSON 39.624,58.674 r270 top (schematic designator U7)
U8_M0 "UCC27282DRCR" IC-10VSON 124.587,58.73 r270 top (schematic designator U8)
U8_M1 "UCC27282DRCR" IC-10VSON 93.404,58.739 r270 top (schematic designator U8)
U8_M2 "UCC27282DRCR" IC-10VSON 62.611,58.674 r270 top (schematic designator U8)
U9_M0 "SN74LVC2G157DCUR" IC-8VSSOP 101.965,53.269 r270 top (schematic designator U9)
U9_M1 "SN74LVC2G157DCUR" IC-8VSSOP 70.782,53.278 r270 top (schematic designator U9)
U9_M2 "SN74LVC2G157DCUR" IC-8VSSOP 39.989,53.213 r270 top (schematic designator U9)
U10_M0 "SN74LVC2G157DCUR" IC-8VSSOP 122.936,53.269 r270 top (schematic designator U10)
U10_M1 "SN74LVC2G157DCUR" IC-8VSSOP 91.753,53.278 r270 top (schematic designator U10)
U10_M2 "SN74LVC2G157DCUR" IC-8VSSOP 60.96,53.213 r270 top (schematic designator U10)
VBAT "5003" TEST-POINT-0001#1 177.546,110.744 r0 top (schematic designator TP1)

## Footprints (in the part's own frame and the unit in brackets; to place one, negate y for a bottom-side part, rotate by r counter-clockwise, add the part's x,y. Pads: shape width x height; smd on the part's side, far side on the other; paste and mask are expansions set on the pad)
43650-0315 [mm]
  round 1.27 hole 1.27 unplated: 1(-6,-1.96) 1(6,-1.96)
  rect 1.482x1.482 / inner rect 1.524x1.524 / far side rect 1.482x1.482 hole 1.02: P$1(3,0)
  round 1.53 / inner round 1.524 / far side round 1.53 hole 1.02: P$2(0,0) P$3(-3,0)
  body extent -6.32,-2.47 6.33,3.14, height 10.03
CAP-47U-0001 [mm]
  rect 3x1.6 smd paste+0 mask+0: 1(-2.2,0) 2(2.2,0)
  silkscreen extent -4.37,-2.75 2.75,2.75, body extent -3.95,-3 3.95,3, height 0.25
CAP-0402 [mm]
  rect 0.6x0.7 smd: 1(-0.5,0) 2(0.5,0)
  body extent -0.5,-0.22 0.5,0.23, height 0.5
CAP-0603 [mm]
  rect 1.15x1.1 smd: 1(-0.8,0) 2(0.8,0)
  body extent -0.8,-0.45 0.8,0.45, height 0.8
CAP-0805 [mm]
  rect 1.16x1.47 smd: 1(-0.88,0) 2(0.88,0)
  body extent -1,-0.63 1,0.63, height 0.94
CAP-1206 [mm]
  rect 1.25x2 smd: 1(-1.375,0) 2(1.375,0)
  body extent -1.6,-0.8 1.6,0.8, height 1.5
CAP-1210 [mm]
  rect 1.53x2.72 smd: 1(-1.341,0) 2(1.341,0)
  body extent -1.6,-1.25 1.6,1.25, height 2.7
CONN-2POS-0001 [mm]
  round 1.02 hole 1.02 unplated: 1(-3,3.94) 1(3,3.94)
  rect 1.482x1.482 / inner rect 1.524x1.524 / far side rect 1.482x1.482 hole 1.02: 1(0,0)
  round 1.53 / inner round 1.524 / far side round 1.53 hole 1.02: 2(0,3)
  body extent -3.57,-2.42 3.57,6.35, height 9.91
CONN-2POS-0002 [mm]
  round 1.27 hole 1.27 unplated: 1(-4.5,-1.96) 1(4.5,-1.96)
  rect 1.482x1.482 / inner rect 1.524x1.524 / far side rect 1.482x1.482 hole 1.02: 1(1.5,0)
  round 1.53 / inner round 1.524 / far side round 1.53 hole 1.02: 2(-1.5,0)
  body extent -4.82,-2.47 4.83,3.14, height 10.03
CONN-4POS-0002 [mm]
  round 1.02 hole 1.02 unplated: 1(-4.5,3.94) 1(4.5,3.94)
  rect 1.482x1.482 / inner rect 1.524x1.524 / far side rect 1.482x1.482 hole 1.02: 1(1.5,0)
  round 1.53 / inner round 1.524 / far side round 1.53 hole 1.02: 2(-1.5,0) 3(1.5,3) 4(-1.5,3)
  body extent -5.07,-2.45 5.08,6.32, height 10.03
CONN-6POS-0001 [mm]
  rect 1.482x1.482 / inner rect 1.524x1.524 / far side rect 1.482x1.482 hole 1.02: 1(3,0)
  round 1.53 / inner round 1.524 / far side round 1.53 hole 1.02: 2(0,0) 3(-3,0) 4(3,3) 5(0,3) 6(-3,3)
  round 1.02 hole 1.02 unplated: ""(-6,3.94) ""(6,3.94)
  body extent -6.57,-2.45 6.58,6.32, height 10.03
DIO-SOD128 [mm]
  rect 2x1.4 smd: 1(0,2.2) 2(0,-2.2)
  silkscreen extent -0.12,-3.55 0.13,-3.3, body extent -1.25,-2.35 1.25,2.35, height 1.05
"DO-214AA (SMBJ)" [mm]
  rect 2.16x2.26 smd: 1(-2.416,0) 2(2.484,0)
  silkscreen extent 3.94,-0.12 4.19,0.13, body extent -2.72,-1.95 2.78,1.95, height 2.45
DO-POWERDI5 [mm] "SMD, 3-Leads, Body 3.975x5.375mm, Pitch 1.84mm"
  rect 1.4x1.39 smd: 1(-2.856,-0.92) 1(-2.856,0.92)
  rect 4.86x3.36 smd: 2(1.126,0)
  silkscreen extent 3.94,-0.12 4.19,0.12, body extent -3.25,-1.98 3.25,1.98, height 1.15
ELEC-100U-0001 [mm]
  rect 1.6x7 smd: 1(0,5.4) 2(0,-5.4)
  silkscreen extent 7.45,9.08 8.13,9.82, body extent -6.6,-7.15 6.6,7.15, height 16.56
FUSE-0001 [mil]
  rect 167x150 smd paste+0 mask+0: 1(-125.5,0) 2(125.5,0)
  silkscreen extent -192,-99 192,99, body extent -213,-103 213,103, height 10
HDR1X5 [mm] "Connector; Header; 5 Position"
  rect 1.5x1.5 hole 0.9: 1(0,0)
  round 1.5 hole 0.9: 2(2.54,0) 3(5.08,0) 4(7.62,0) 5(10.16,0)
  silkscreen extent -1.27,-1.27 11.43,1.27
IC-8SOIC [mm]
  rect 0.6x1.5 smd: 1(-1.905,-2.5) 2(-0.635,-2.5) 3(0.635,-2.5) 4(1.905,-2.5) 5(1.905,2.5) 6(0.635,2.5) 7(-0.635,2.5) 8(-1.905,2.5)
  silkscreen extent -2.03,-3.93 -1.78,-3.69, body extent -2.45,-3 2.45,3, height 1.75
IC-8VSONCLIP [mm]
  rect 0.4x0.7 smd paste-100 mask+0.05: 1(2.812,0.877) 2(0.862,0.877) 2(1.512,0.877) 2(2.162,0.877) 3(0.862,4.077) 3(1.512,4.077) 3(2.162,4.077) 3(2.812,4.077)
  rect 2.45x1.9 smd paste-100 mask+0.05: 3(1.837,2.917)
  silkscreen extent 0.19,0.03 3.49,4.18, body extent 0.18,0.89 3.48,4.19, height 1.1
IC-8VSSOP [mm]
  rect 0.75x0.25 smd: 1(0,1.5) 2(0,1) 3(0,0.5) 4(0,0) 5(3.3,0) 6(3.3,0.5) 7(3.3,1) 8(3.3,1.5)
  silkscreen extent -1.02,1.4 -0.76,1.65, body extent 0.1,-0.24 3.2,1.76, height 0.9
IC-10VSON [mm]
  rrect25% 0.6x0.24 smd mask+0: 1(-1.4,1) 2(-1.4,0.5) 3(-1.4,0) 4(-1.4,-0.5) 5(-1.4,-1) 6(1.4,-1) 7(1.4,-0.5) 8(1.4,0) 9(1.4,0.5) 10(1.4,1)
  round 0.368 hole 0.2 mask+0: 11(-0.508,0) 11(0,0.889) 11(0,-0.889) 11(0.508,0)
  rrect5% 1.65x2.4 smd paste-2 mask+0: 11(0,0)
  Top Layer region: 0.375,1.2 0.825,1.2 0.825,-1.2 0.375,-1.2 0.375,-1.7 0.125,-1.7 0.125,-1.2 -0.125,-1.2 -0.125,-1.7 -0.375,-1.7 -0.375,-1.2 -0.825,-1.2 -0.825,1.2 -0.375,1.2 -0.375,1.7 -0.125,1.7 -0.125,1.2 0.125,1.2 0.125,1.7 0.375,1.7
  silkscreen extent -2.39,-1.5 1.5,1.5, body extent -1.48,-1.48 1.52,1.52, height 1
IC-10WSON [mm]
  rect 0.6x0.3 smd: 1(-1.9,1.6) 2(-1.9,0.8) 3(-1.9,0) 4(-1.9,-0.8) 5(-1.9,-1.6) 6(1.9,-1.6) 7(1.9,-0.8) 8(1.9,0) 9(1.9,0.8) 10(1.9,1.6)
  rect 2.6x3 smd: 11(0,0)
  body extent -2,-2 2,2, height 0.8
IC-LQFP48 [mm]
  rect 1.194x0.305 smd paste+0 mask+0: 1(-4.25,2.75) 2(-4.25,2.25) 3(-4.25,1.75) 4(-4.25,1.25) 5(-4.25,0.75) 6(-4.25,0.25) 7(-4.25,-0.25) 8(-4.25,-0.75) 9(-4.25,-1.25) 10(-4.25,-1.75) 11(-4.25,-2.25) 12(-4.25,-2.75) 25(4.25,-2.75) 26(4.25,-2.25) 27(4.25,-1.75) 28(4.25,-1.25) 29(4.25,-0.75) 30(4.25,-0.25) 31(4.25,0.25) 32(4.25,0.75) 33(4.25,1.25) 34(4.25,1.75) 35(4.25,2.25) 36(4.25,2.75)
  rect 0.305x1.194 smd paste+0 mask+0: 13(-2.75,-4.25) 14(-2.25,-4.25) 15(-1.75,-4.25) 16(-1.25,-4.25) 17(-0.75,-4.25) 18(-0.25,-4.25) 19(0.25,-4.25) 20(0.75,-4.25) 21(1.25,-4.25) 22(1.75,-4.25) 23(2.25,-4.25) 24(2.75,-4.25) 37(2.75,4.25) 38(2.25,4.25) 39(1.75,4.25) 40(1.25,4.25) 41(0.75,4.25) 42(0.25,4.25) 43(-0.25,4.25) 44(-0.75,4.25) 45(-1.25,4.25) 46(-1.75,4.25) 47(-2.25,4.25) 48(-2.75,4.25)
  silkscreen extent -5.43,-5.35 5.35,5.35, body extent -4.5,-4.5 4.5,4.5, height 1.6
IC-SOT23-3 [mm]
  rect 0.6x0.7 smd: 1(-0.95,-1) 2(0.95,-1) 3(0,1)
  body extent -1.46,-1.18 1.46,1.19, height 1.12
IC-SOT-223-4 [mm]
  rect 1.4x1.2 smd mask+0.07: 1(-3,2.3) 3(-3,-2.3) 4(-3,0)
  rect 1.4x3.5 smd: 2(3,0)
  body extent -3.5,-3.25 3.5,3.25, height 1.68
IND25X25CZ [mil]
  rect 98x135 smd paste-67.5 mask-67.5: 1(-107,0) 2(107,0)
  silkscreen extent -155,-138 155,138, body extent -150,-133 150,133, height 118
IND-15U-0002 [mm] "12V Buck"
  rect 3.3x3.4 smd paste+0 mask+0: 1(3.175,7.62) 1(8.001,7.62) 2(3.175,1.524) 2(8.001,1.524)
  silkscreen extent 5.08,-0.25 6.11,9.4, body extent -0.19,-0.33 11.11,9.47, height 10.79
LED-0603 [mm]
  rect 0.8x0.8 smd: 1(2.291,0.751) 2(0.589,0.751)
  silkscreen extent -0.2,0.34 1.52,1.13, body extent 0.65,0.36 2.25,1.16, height 0.39
RES-0402 [mm]
  rect 0.6x0.7 smd: 1(-0.5,0) 2(0.5,0)
  body extent -0.5,-0.25 0.5,0.25, height 0.3
RES-0603 [mm]
  rect 1.15x1.1 smd: 1(-0.8,0) 2(0.8,0)
  body extent -0.8,-0.4 0.8,0.4, height 0.43
RES-0805 [mm]
  rect 1.2x1.2 smd: 1(-0.95,0) 2(0.95,0)
  body extent -1,-0.6 1,0.6, height 0.71
RES-1210 [mm] "Chip Resistor, 2-Leads, Body 3.10x2.60mm, IPC High Density"
  rect 0.95x2.6 smd: 1(-1.275,0) 2(1.275,0)
  body extent -1.6,-1.35 1.6,1.35, height 0.6
TEST-POINT-0001#1 [mm] "2024 miniature test point"
  round 1.3 hole 1: 1(0,0)
  body extent -1.27,-1.27 1.27,1.27, height 4.57
TEST-POINT-0001#2 [mm] "2024 miniature test point"
  round 1.3 hole 1: ""(0,0)
  body extent -1.27,-1.27 1.27,1.27, height 4.57